# EAGLE board 8x8_5mm_2.4x2.4_header_multiplexed (EAGLE 6.0)
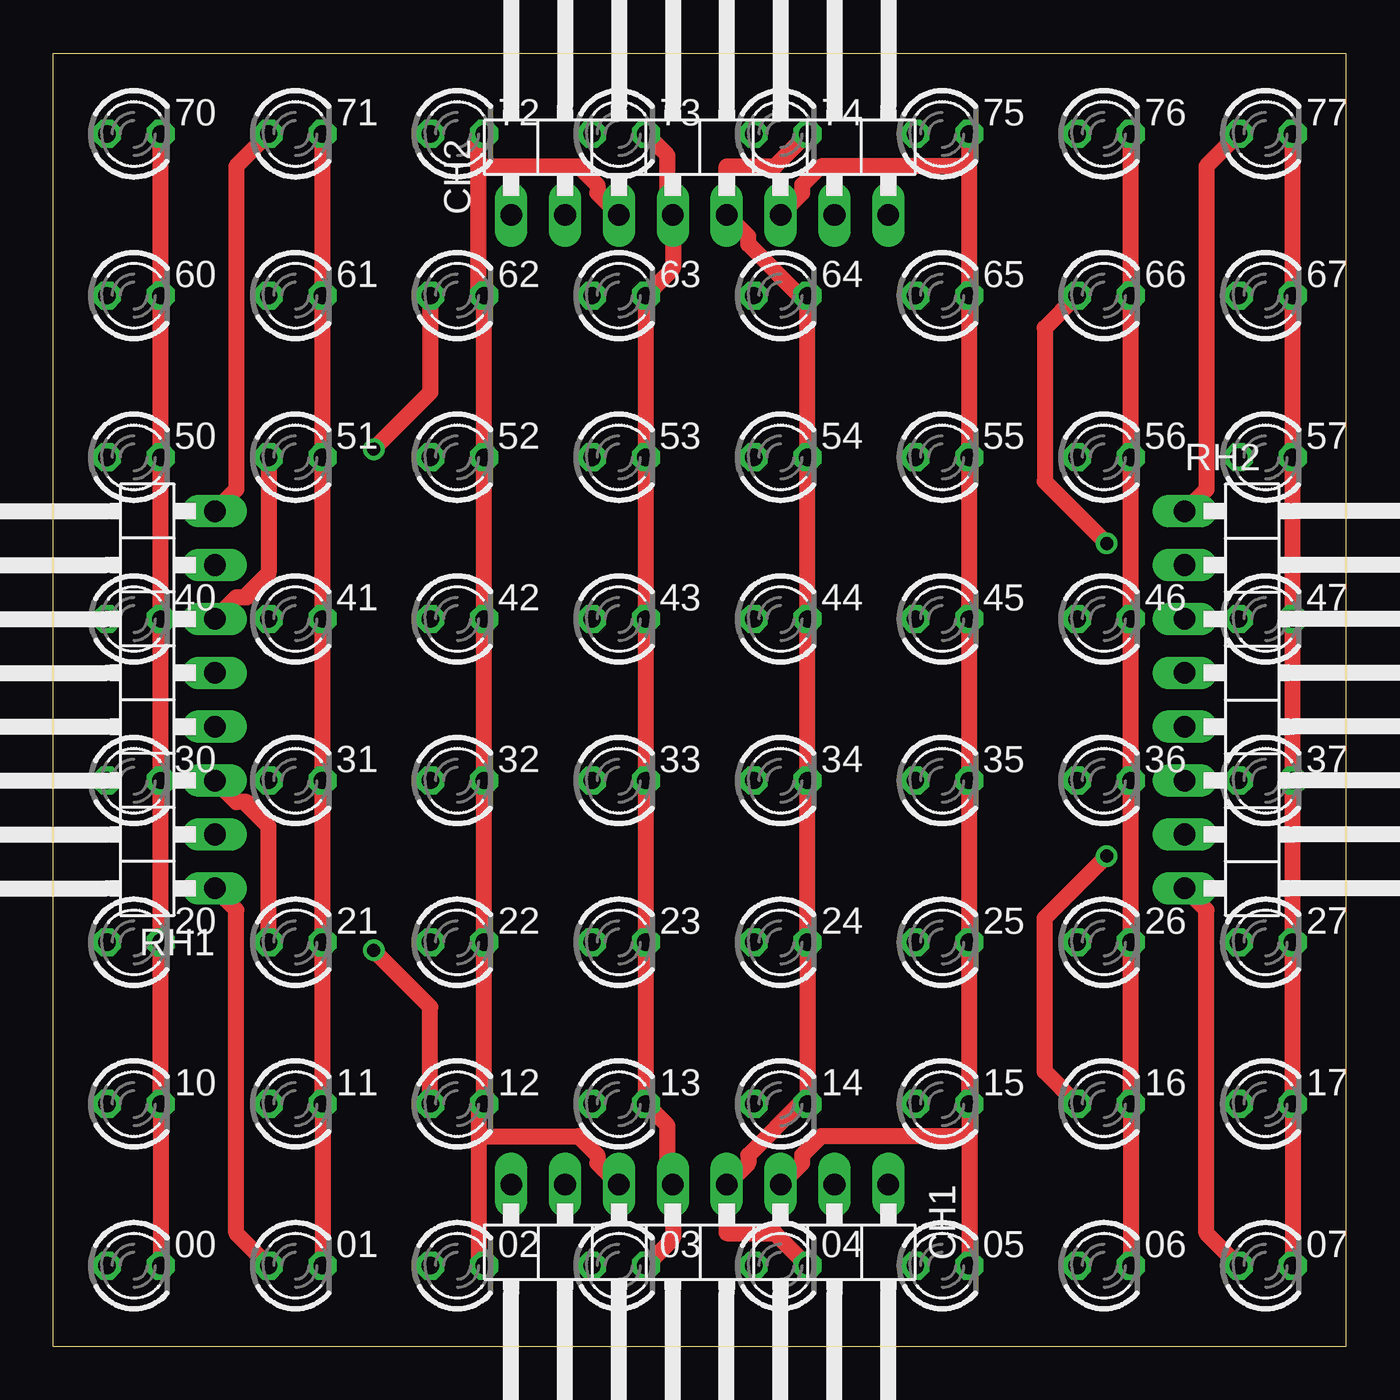
[diagram p0: board, top side]
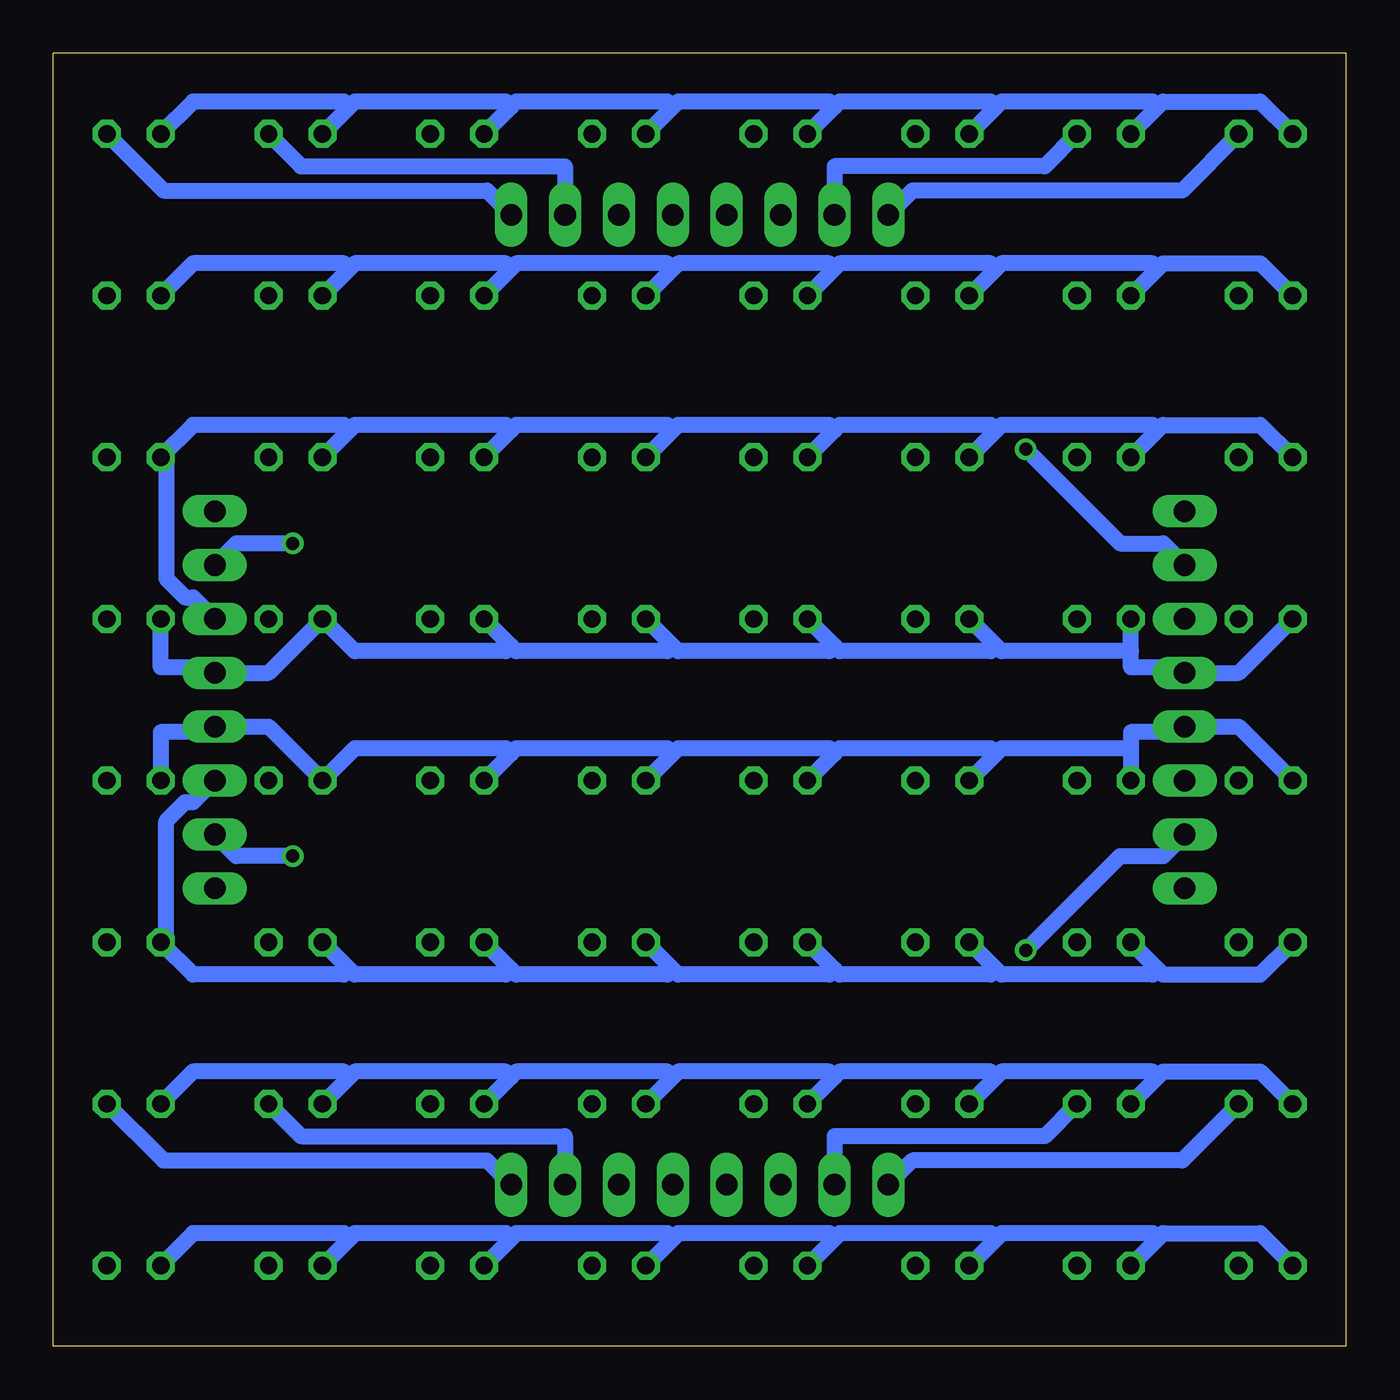
[diagram p1: board, bottom side, seen from below]

Size 60.96 x 60.96 mm. Coordinates in mm from the lower left corner, seen from the top.
Outline: 0,0 0,60.96 60.96,60.96 60.96,0 0,0
Copper layers (1*16): Top 0.035mm / dielectric 1.5mm / Bottom 0.035mm
Design rules: minimum track width 30mil, minimum drill 24mil, track to track 15mil, track to pad 15mil, pad to pad 8mil, via to via 8mil, smd to smd 8mil, copper to edge 40mil, drill to drill 8mil, minimum pad ring 10mil, minimum via ring 8mil, stop-mask expansion 4mil, vias tented up to drill 0mil, thermal gap 10mil

## Footprints (pad centres in the part's own frame; a part is rotated, then mirrored left to right if it is on the bottom)
LED3MM = drill 0.813 octagon: A -1.27,0; K 1.27,0
1X08/90 = drill 1.016 long: 1 -8.89,-3.81; 2 -6.35,-3.81; 3 -3.81,-3.81; 4 -1.27,-3.81; 5 1.27,-3.81; 6 3.81,-3.81; 7 6.35,-3.81; 8 8.89,-3.81

## Placement (x,y rotation side)
00  [LED3MM]  3.81,3.81 0 top
01  [LED3MM]  11.43,3.81 0 top
02  [LED3MM]  19.05,3.81 0 top
03  [LED3MM]  26.67,3.81 0 top
04  [LED3MM]  34.29,3.81 0 top
05  [LED3MM]  41.91,3.81 0 top
06  [LED3MM]  49.53,3.81 0 top
07  [LED3MM]  57.15,3.81 0 top
10  [LED3MM]  3.81,11.43 0 top
11  [LED3MM]  11.43,11.43 0 top
12  [LED3MM]  19.05,11.43 0 top
13  [LED3MM]  26.67,11.43 0 top
14  [LED3MM]  34.29,11.43 0 top
15  [LED3MM]  41.91,11.43 0 top
16  [LED3MM]  49.53,11.43 0 top
17  [LED3MM]  57.15,11.43 0 top
20  [LED3MM]  3.81,19.05 0 top
21  [LED3MM]  11.43,19.05 0 top
22  [LED3MM]  19.05,19.05 0 top
23  [LED3MM]  26.67,19.05 0 top
24  [LED3MM]  34.29,19.05 0 top
25  [LED3MM]  41.91,19.05 0 top
26  [LED3MM]  49.53,19.05 0 top
27  [LED3MM]  57.15,19.05 0 top
30  [LED3MM]  3.81,26.67 0 top
31  [LED3MM]  11.43,26.67 0 top
32  [LED3MM]  19.05,26.67 0 top
33  [LED3MM]  26.67,26.67 0 top
34  [LED3MM]  34.29,26.67 0 top
35  [LED3MM]  41.91,26.67 0 top
36  [LED3MM]  49.53,26.67 0 top
37  [LED3MM]  57.15,26.67 0 top
40  [LED3MM]  3.81,34.29 0 top
41  [LED3MM]  11.43,34.29 0 top
42  [LED3MM]  19.05,34.29 0 top
43  [LED3MM]  26.67,34.29 0 top
44  [LED3MM]  34.29,34.29 0 top
45  [LED3MM]  41.91,34.29 0 top
46  [LED3MM]  49.53,34.29 0 top
47  [LED3MM]  57.15,34.29 0 top
50  [LED3MM]  3.81,41.91 0 top
51  [LED3MM]  11.43,41.91 0 top
52  [LED3MM]  19.05,41.91 0 top
53  [LED3MM]  26.67,41.91 0 top
54  [LED3MM]  34.29,41.91 0 top
55  [LED3MM]  41.91,41.91 0 top
56  [LED3MM]  49.53,41.91 0 top
57  [LED3MM]  57.15,41.91 0 top
60  [LED3MM]  3.81,49.53 0 top
61  [LED3MM]  11.43,49.53 0 top
62  [LED3MM]  19.05,49.53 0 top
63  [LED3MM]  26.67,49.53 0 top
64  [LED3MM]  34.29,49.53 0 top
65  [LED3MM]  41.91,49.53 0 top
66  [LED3MM]  49.53,49.53 0 top
67  [LED3MM]  57.15,49.53 0 top
70  [LED3MM]  3.81,57.15 0 top
71  [LED3MM]  11.43,57.15 0 top
72  [LED3MM]  19.05,57.15 0 top
73  [LED3MM]  26.67,57.15 0 top
74  [LED3MM]  34.29,57.15 0 top
75  [LED3MM]  41.91,57.15 0 top
76  [LED3MM]  49.53,57.15 0 top
77  [LED3MM]  57.15,57.15 0 top
CH1  [1X08/90]  30.48,3.81 180 top
CH2  [1X08/90]  30.48,57.15 0 top
RH1  [1X08/90]  3.81,30.48 90 top
RH2  [1X08/90]  57.15,30.48 270 top

## Library data of the parts
00 01-07 10-17 20-27 30-37 40-47 50-57 60-67 70-77 = led
CH1 CH2 RH1 RH2 = pinhead

## Nets
C0: 00.K 10.K 20.K 30.K 40.K 50.K 60.K 70.K CH1.8 CH2.1
C1: 01.K 11.K 21.K 31.K 41.K 51.K 61.K 71.K CH1.7 CH2.2
C2: 02.K 12.K 22.K 32.K 42.K 52.K 62.K 72.K CH1.6 CH2.3
C3: 03.K 13.K 23.K 33.K 43.K 53.K 63.K 73.K CH1.5 CH2.4
C4: 04.K 14.K 24.K 34.K 44.K 54.K 64.K 74.K CH1.4 CH2.5
C5: 05.K 15.K 25.K 35.K 45.K 55.K 65.K 75.K CH1.3 CH2.6
C6: 06.K 16.K 26.K 36.K 46.K 56.K 66.K 76.K CH1.2 CH2.7
C7: 07.K 17.K 27.K 37.K 47.K 57.K 67.K 77.K CH1.1 CH2.8
R0: 00.A 01.A 02.A 03.A 04.A 05.A 06.A 07.A RH1.1 RH2.8
R1: 10.A 11.A 12.A 13.A 14.A 15.A 16.A 17.A RH1.2 RH2.7
R2: 20.A 21.A 22.A 23.A 24.A 25.A 26.A 27.A RH1.3 RH2.6
R3: 30.A 31.A 32.A 33.A 34.A 35.A 36.A 37.A RH1.4 RH2.5
R4: 40.A 41.A 42.A 43.A 44.A 45.A 46.A 47.A RH1.5 RH2.4
R5: 50.A 51.A 52.A 53.A 54.A 55.A 56.A 57.A RH1.6 RH2.3
R6: 60.A 61.A 62.A 63.A 64.A 65.A 66.A 67.A RH1.7 RH2.2
R7: 70.A 71.A 72.A 73.A 74.A 75.A 76.A 77.A RH1.8 RH2.1

## Tracks (layer width: path | path; a pad name or v marks a point on that pad's centre or on a via)
C0
  Top 0.762: 00.K 10.K 20.K 30.K 40.K 50.K 60.K 70.K
  Bottom 0.762: CH1.8 20.45,8.76 7.75,8.76 10.K | CH2.1 20.45,54.48 7.75,54.48 70.K
C1
  Top 0.762: 01.K 11.K 21.K 31.K 41.K 51.K 61.K 71.K
  Bottom 0.762: CH1.7 24.13,9.91 14.22,9.91 11.K | CH2.2 24.13,55.63 14.22,55.63 71.K
C2
  Top 0.762: 02.K 20.07,4.06 20.07,9.91 | 20.07,9.91 20.07,11.18 12.K 22.K 32.K 42.K 52.K 62.K 20.07,49.78 20.07,55.63 | 72.K 20.07,56.9 20.07,55.63 | CH1.6 25.65,8.64 25.65,9.02 24.77,9.91 20.07,9.91 | CH2.3 25.65,54.36 25.65,54.74 24.77,55.63 20.07,55.63
C3
  Top 0.762: 73.K 28.96,56.13 28.96,53.59 CH2.4 29.21,50.8 63.K 53.K 43.K 33.K 23.K 13.K 28.96,10.41 28.96,7.87 CH1.5 29.21,5.08 03.K
C4
  Top 0.762: 74.K 34.04,55.63 31.75,55.63 CH2.5 32.77,52.32 32.77,51.94 35.31,49.4 64.K 54.K 44.K 34.K 24.K 14.K 35.31,11.56 32.77,9.02 32.77,8.64 CH1.4 31.75,5.33 34.04,5.33 04.K
C5
  Top 0.762: 43.18,9.91 15.K 25.K 35.K 45.K 55.K 65.K 43.18,55.63 | 43.18,9.91 05.K | 43.18,55.63 75.K | CH1.3 35.31,8.64 35.31,9.02 36.2,9.91 43.18,9.91 | CH2.6 35.31,54.36 35.31,54.74 36.2,55.63 43.18,55.63
C6
  Top 0.762: 06.K 16.K 26.K 36.K 46.K 56.K 66.K 76.K
  Bottom 0.762: CH1.2 36.83,9.91 49.28,9.91 16.K | CH2.7 36.83,55.63 49.28,55.63 76.K
C7
  Top 0.762: 07.K 17.K 27.K 37.K 47.K 57.K 67.K 77.K
  Bottom 0.762: CH1.1 40.51,8.76 55.75,8.76 17.K | CH2.8 40.51,54.48 55.75,54.48 77.K
R0
  Top 0.762: RH1.1 8.64,20.57 8.64,5.33 01.A | RH2.8 54.36,20.57 54.36,5.33 07.A
  Bottom 0.762: 00.A 4.06,5.33 8.64,5.33 8.89,5.08 | 01.A 8.89,5.08 | 16.51,5.08 16.26,5.33 9.14,5.33 8.89,5.08 | 16.51,5.08 02.A | 24.13,5.08 23.88,5.33 16.76,5.33 16.51,5.08 | 24.13,5.08 03.A | 31.75,5.08 31.5,5.33 24.38,5.33 24.13,5.08 | 31.75,5.08 04.A | 39.37,5.08 39.12,5.33 32,5.33 31.75,5.08 | 39.37,5.08 05.A | 46.99,5.08 46.74,5.33 39.62,5.33 39.37,5.08 | 46.99,5.08 06.A | 07.A 54.36,5.33 47.24,5.33 46.99,5.08
R1  (via drill 0.61)
  Top 0.762: v15.11,18.67 17.78,16 12.A | v49.66,23.11 46.74,20.19 46.74,12.95 16.A
  Bottom 0.762: 10.A 4.06,12.95 8.64,12.95 8.89,12.7 | 11.A 8.89,12.7 | 16.51,12.7 16.26,12.95 9.14,12.95 8.89,12.7 | 16.51,12.7 12.A | 24.13,12.7 23.88,12.95 16.76,12.95 16.51,12.7 | 24.13,12.7 13.A | 31.75,12.7 31.5,12.95 24.38,12.95 24.13,12.7 | 31.75,12.7 14.A | 39.37,12.7 39.12,12.95 32,12.95 31.75,12.7 | 39.37,12.7 15.A | 46.99,12.7 46.74,12.95 39.62,12.95 39.37,12.7 | 46.99,12.7 16.A | 17.A 54.36,12.95 47.24,12.95 46.99,12.7 | RH1.2 8.64,23.11 10.67,23.11 v15.11,18.67 | RH2.7 52.32,23.11 v49.66,23.11
R2
  Top 0.762: RH1.3 8.64,25.65 9.14,25.65 9.14,25.53 10.16,24.51 21.A
  Bottom 0.762: 20.A 4.06,17.53 8.64,17.53 8.89,17.78 | 21.A 8.89,17.78 | 16.51,17.78 16.26,17.53 9.14,17.53 8.89,17.78 | 16.51,17.78 22.A | 24.13,17.78 23.88,17.53 16.76,17.53 16.51,17.78 | 24.13,17.78 23.A | 31.75,17.78 31.5,17.53 24.38,17.53 24.13,17.78 | 31.75,17.78 24.A | 39.37,17.78 39.12,17.53 32,17.53 31.75,17.78 | 39.37,17.78 25.A | 46.99,17.78 46.74,17.53 39.62,17.53 39.37,17.78 | 46.99,17.78 26.A | 46.99,17.78 47.24,17.53 54.36,17.53 27.A 55.63,19.3 55.63,24.77 54.74,25.65 54.36,25.65 RH2.6
R3
  Bottom 0.762: 37.A 55.88,28.96 53.59,28.96 RH2.5 50.8,29.21 36.A 46.74,28.19 39.62,28.19 39.37,27.94 | 30.A 5.08,29.21 RH1.4 7.87,28.96 10.16,28.96 10.16,28.19 | 10.16,28.19 31.A | 16.51,27.94 16.26,28.19 10.16,28.19 | 16.51,27.94 32.A | 24.13,27.94 23.88,28.19 16.76,28.19 16.51,27.94 | 24.13,27.94 33.A | 31.75,27.94 31.5,28.19 24.38,28.19 24.13,27.94 | 31.75,27.94 34.A | 39.37,27.94 39.12,28.19 32,28.19 31.75,27.94 | 39.37,27.94 35.A
R4
  Bottom 0.762: 47.A 55.88,32 53.59,32 RH2.4 50.8,31.75 46.A 46.74,32.77 39.62,32.77 39.37,33.02 | 40.A 5.08,31.75 RH1.5 7.87,32 10.16,32 10.16,32.77 | 10.16,32.77 41.A | 16.51,33.02 16.26,32.77 10.16,32.77 | 16.51,33.02 42.A | 24.13,33.02 23.88,32.77 16.76,32.77 16.51,33.02 | 24.13,33.02 43.A | 31.75,33.02 31.5,32.77 24.38,32.77 24.13,33.02 | 31.75,33.02 44.A | 39.37,33.02 39.12,32.77 32,32.77 31.75,33.02 | 39.37,33.02 45.A
R5
  Top 0.762: RH1.6 8.64,35.31 9.14,35.31 9.14,35.43 10.16,36.45 51.A
  Bottom 0.762: 50.A 4.06,43.43 8.64,43.43 8.89,43.18 | 51.A 8.89,43.18 | 16.51,43.18 16.26,43.43 9.14,43.43 8.89,43.18 | 16.51,43.18 52.A | 24.13,43.18 23.88,43.43 16.76,43.43 16.51,43.18 | 24.13,43.18 53.A | 31.75,43.18 31.5,43.43 24.38,43.43 24.13,43.18 | 31.75,43.18 54.A | 39.37,43.18 39.12,43.43 32,43.43 31.75,43.18 | 39.37,43.18 55.A | 46.99,43.18 46.74,43.43 39.62,43.43 39.37,43.18 | 46.99,43.18 56.A | 46.99,43.18 47.24,43.43 54.36,43.43 57.A 55.63,41.66 55.63,36.2 54.74,35.31 54.36,35.31 RH2.3
R6  (via drill 0.61)
  Top 0.762: v15.11,42.29 17.78,44.96 62.A | v49.66,37.85 46.74,40.77 46.74,48.01 66.A
  Bottom 0.762: 60.A 4.06,51.05 8.64,51.05 8.89,50.8 | 61.A 8.89,50.8 | 16.51,50.8 16.26,51.05 9.14,51.05 8.89,50.8 | 16.51,50.8 62.A | 24.13,50.8 23.88,51.05 16.76,51.05 16.51,50.8 | 24.13,50.8 63.A | 31.75,50.8 31.5,51.05 24.38,51.05 24.13,50.8 | 31.75,50.8 64.A | 39.37,50.8 39.12,51.05 32,51.05 31.75,50.8 | 39.37,50.8 65.A | 46.99,50.8 46.74,51.05 39.62,51.05 39.37,50.8 | 46.99,50.8 66.A | 67.A 54.36,51.05 47.24,51.05 46.99,50.8 | RH1.7 8.64,37.85 10.67,37.85 v15.11,42.29 | RH2.2 52.32,37.85 v49.66,37.85
R7
  Top 0.762: RH1.8 8.64,40.39 8.64,55.63 71.A | RH2.1 54.36,40.39 54.36,55.63 77.A
  Bottom 0.762: 70.A 4.06,58.67 8.64,58.67 8.89,58.42 | 71.A 8.89,58.42 | 16.51,58.42 16.26,58.67 9.14,58.67 8.89,58.42 | 16.51,58.42 72.A | 24.13,58.42 23.88,58.67 16.76,58.67 16.51,58.42 | 24.13,58.42 73.A | 31.75,58.42 31.5,58.67 24.38,58.67 24.13,58.42 | 31.75,58.42 74.A | 39.37,58.42 39.12,58.67 32,58.67 31.75,58.42 | 39.37,58.42 75.A | 46.99,58.42 46.74,58.67 39.62,58.67 39.37,58.42 | 46.99,58.42 76.A | 77.A 54.36,58.67 47.24,58.67 46.99,58.42